# EAGLE board lps25h_board_small (EAGLE 7.2.0)
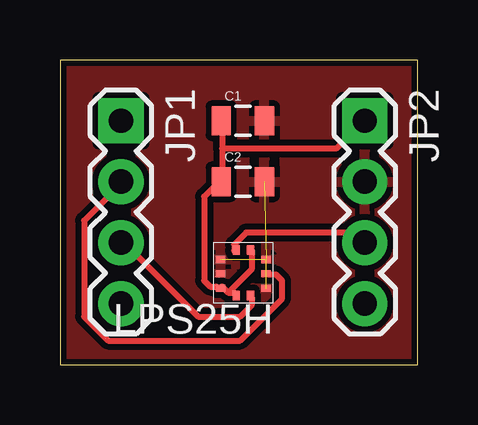
[diagram p0: board, top side]
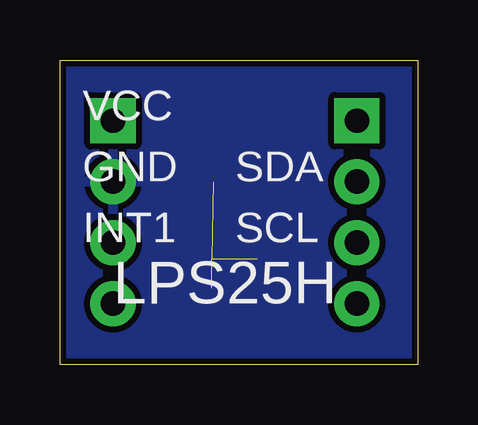
[diagram p1: board, bottom side, seen from below]

Size 14.91 x 12.69 mm. Coordinates in mm from the lower left corner, seen from the top.
Outline: 0,0 14.91,0 14.91,12.69 0,12.69 0,0
Copper layers (1*16): Top 0.035mm / dielectric 1.5mm / Bottom 0.035mm
Design rules "default *": minimum track width 0.25mm, minimum drill 0.25mm, track to track 0.25mm, track to pad 0.25mm, pad to pad 0.25mm, via to via 0.25mm, smd to smd 0.25mm, copper to edge 0.25mm, drill to drill 0.25mm, minimum pad ring 10mil, minimum via ring 8mil, stop-mask expansion 4mil, vias tented up to drill 0mil, thermal gap 10mil

## Footprints (pad centres in the part's own frame; a part is rotated, then mirrored left to right if it is on the bottom)
0805 = smd 0.8 x 1.2: 1 -0.9,0; 2 0.9,0
1X04 = drill 1.016 pad 1.88 square: 1 0,0 | drill 1.016 pad 1.88: 2 2.54,0; 3 5.08,0; 4 7.62,0
LPS25H_PADS = smd 0.3 x 0.4: 1 1.55,2.2; 2 0.95,2.2; 6 0.95,0.3; 7 1.55,0.3 | smd 0.4 x 0.3: 3 0.3,1.9; 4 0.3,1.3; 5 0.3,0.7; 8 2.2,0.7; 9 2.2,1.3; 10 2.2,1.9

## Placement (x,y rotation side)
C1  100 nF  [0805]  7.62,10.16 0 top
C2  10uF  [0805]  7.62,7.62 0 top
JP1  [1X04]  2.54,10.16 270 top
JP2  [1X04]  12.7,10.16 270 top
U$1  LPS25H  [LPS25H_PADS]  8.89,5.08 180 top

## Library data of the parts
C1 C2 = SparkFun-Capacitors
JP1 JP2 = SparkFun-Connectors
U$1 = sensors

## Nets
GND: C1.2 C2.2 JP2.2 U$1.3 U$1.5 U$1.8 U$1.9
INT1: JP2.3 U$1.7
JP1.1: JP1.1
JP1.4: JP1.4
JP2.4: JP2.4
SCL: JP1.3 U$1.2
SDA: JP1.2 U$1.4
VCC: C1.1 C2.1 JP2.1 U$1.1 U$1.6 U$1.10

## Tracks (layer width: path | path; a pad name or v marks a point on that pad's centre or on a via)
GND  (3 unrouted)
  pour Bottom: 0,0 15.24,0 15.24,12.7 0,12.7
  pour Top: 0,12.7 15.24,12.7 15.24,0 0,0
INT1
  Top 0.25: U$1.7 7.25,4.75 7.25,5 7.75,5.5 12.25,5.5 12.5,5.25 JP2.3
SCL
  Top 0.25: U$1.2 8,2.75 8,2.5 7.5,2 5.75,2 2.75,5 JP1.3
SDA
  Top 0.25: U$1.4 8.75,3.75 9,3.75 9.25,3.5 9.25,2.75 7.5,1 2,1 1,2 1,6 2.5,7.5 JP1.2
VCC
  Top 0.25: 7,3 7.25,3 U$1.1 | 7,3 6.75,3.25 U$1.10 6.5,3.25 6.25,3.25 6,3.5 6,7 6.5,7.5 C2.1 6.75,7.75 6.75,9 | 7,3 8,4 8,4.75 U$1.6 | 6.75,9 6.75,10 C1.1 | 6.75,9 11.5,9 12.5,10 JP2.1

## Text on the board
bPlace: VCC | SDA | GND | SCL | INT1 | LPS25H